# Altium PCB CurrentShuntAmp2old.PcbDoc
Units mil, origin at the board's own origin, x right, y up, seen from the top; angles counter-clockwise.
Board outline 922.5 x 280 mil, 2 copper layers (Component Side, Bottom Layer), stack 12.8 mil thick; 5 components, 5 nets, 20 pads, 0 vias.
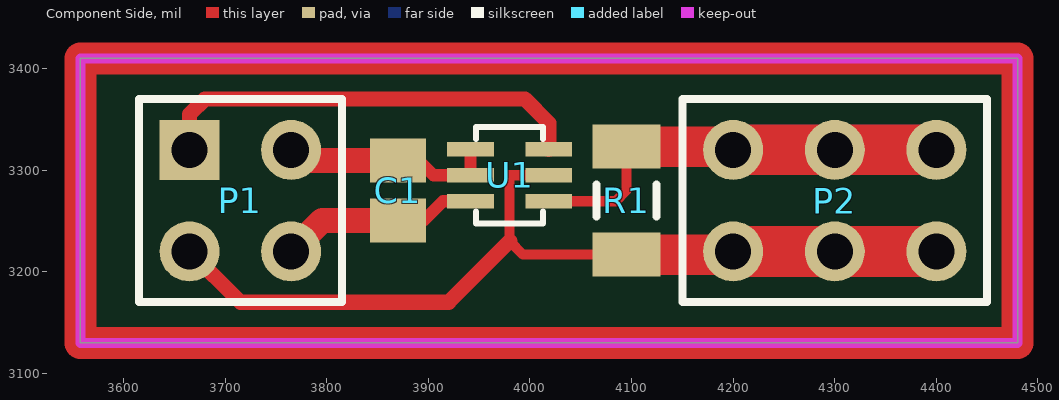
[diagram p0: Component Side view]
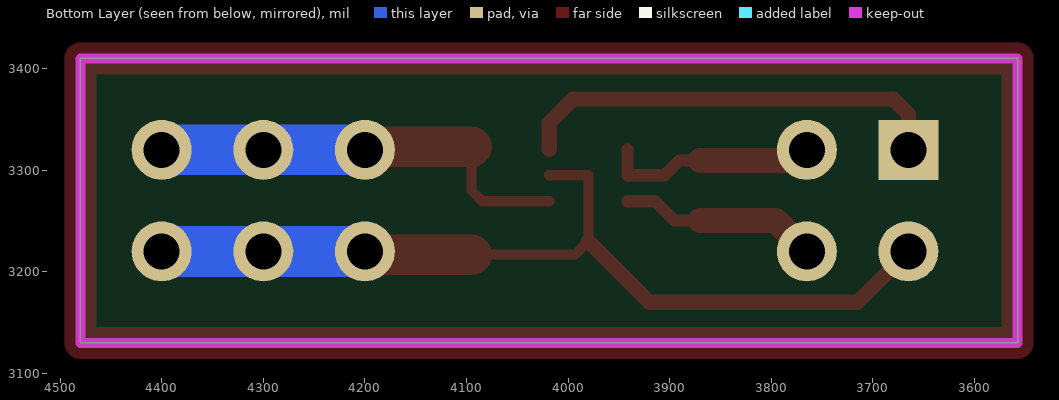
[diagram p1: Bottom Layer view, seen from below]
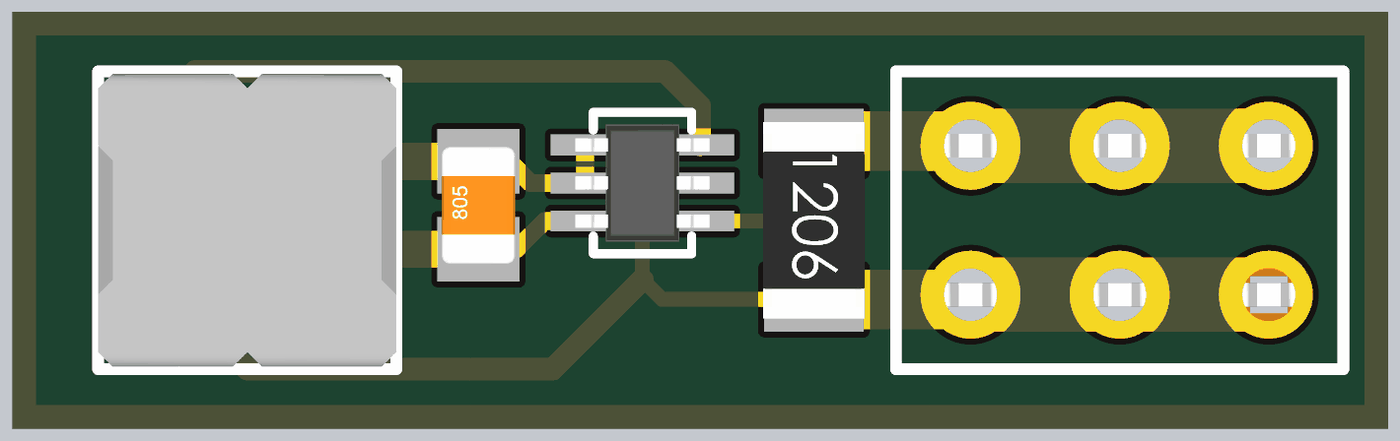
[diagram p2: 3D render of the assembled board from above, using the file's embedded part models]

## Layer stack, top to bottom
Top Solder: solder mask 0.4, Solder Resist, Dk 3.5
Component Side: signal copper 1.4
Dielectric 1: core 10, FR-4, Dk 4.2
Bottom Layer: signal copper 1.4
Solder Side: solder mask 0.4, Solder Resist, Dk 3.5

## Board outline
3557.5,3130 4480,3130 4480,3410 3557.5,3410

## Design rules (kind name [scope] priority, off if disabled: settings)
Clearance [All] p1: gap=10
PolygonConnect [All] p1: connectstyle=Direct reliefconductorwidth=10 reliefentries=4 polygonreliefangle="90 Angle" airgapwidth=10
RoutingVias [All] p1: holewidth=28 width=50 viastyle="Through Hole" minholewidth=28 minwidth=50 maxholewidth=28 maxwidth=50
SolderMaskExpansion [All] p1: expansion=4
Width [All] p1: maxlimit=50 minlimit=10 preferedwidth=10 minimp=50.000000 maximp=50.000000 favimp=50.000000
30 further rules are at their usual default settings.

## Classes and differential pairs
component class CurrentShuntAmp2: P1 P2 R1 U1

## Components (designator, comment, footprint, x,y, rotation, side; value= is the part's Value field where it differs from the comment)
C1 "Cap" C0805 3870,3280 r90 top
P1 "Header 2X2" HDR2X2 3665,3320 r270 top
P2 "Header 3X2" HDR2X3 4400,3320 r180 top
R1 "Res1" C1206 4095,3270 r270 top
U1 "INA213AIDCKR" DCK6 3980,3295 r0 top

## Footprints (in the part's own frame and the unit in brackets; to place one, negate y for a bottom-side part, rotate by r counter-clockwise, add the part's x,y. Pads: shape width x height; smd on the part's side, far side on the other; paste and mask are expansions set on the pad)
C0805 [mm] "Chip Capacitor, Body 2.0x1.3mm, IPC High Density"
  rect 1.1x1.4 smd: 1(-0.75,0) 2(0.75,0)
  body extent -1,-0.62 1,0.63, height 0.78
C1206 [mm] "Chip Capacitor, Body 3.2x1.6mm, IPC High Density"
  rect 1.1x1.7 smd: 1(-1.35,0) 2(1.35,0)
  silkscreen extent -0.4,-0.75 0.4,0.75, body extent -1.67,-0.86 1.68,0.87, height 0.85
DCK6 [mil]
  rect 46x14 smd: 1(-38.5,25.59) 2(-38.5,0) 3(-38.5,-25.59) 4(38.5,-25.59) 5(38.5,0) 6(38.5,25.59)
  silkscreen extent -33,-48 33,48, body extent -45,-39 45,39, height 37
HDR2X2 [mm] "Connector; Header; 2x2 Position"
  rect 1.5x1.5 hole 0.9: 1(0,0)
  round 1.5 hole 0.9: 2(0,2.54) 3(2.54,0) 4(2.54,2.54)
  silkscreen extent -1.27,-1.27 3.81,3.81, body extent -1.23,-1.27 3.77,3.81, height 8.6
HDR2X3 [mm] "Connector; Header; 3x2 Position"
  round 1.5 hole 0.9: 1(0,0) 2(0,2.54) 3(2.54,0) 4(2.54,2.54) 5(5.08,0) 6(5.08,2.54)
  silkscreen extent -1.27,-1.27 6.35,3.81, body extent -1.39,-1.23 6.48,3.77, height 2.79

## Part data
C1: library part "Cap Semi", "Capacitor (Semiconductor SIM Model)"
P1: "Header, 2-Pin, Dual row"
P2: "Header, 3-Pin, Dual row"
R1: "Resistor"
U1: "Imported"

## Nets (pads, with @x,y where several pads share a name; then routed paths per layer and width w, separated by ;. In a path a pad name is that pad's centre, name@x,y a point inside that pad or via, vN(x,y) a via of type N, cw(c..) or ccw(c..) an arc to the next point about the centre after c; other vN are vias at no path point)
ADC: P1.1 U1.6 | length 430.4
  Component Side w15: P1.1 3665,3355 3680,3370 3995,3370 4018.5,3346.5 U1.6
GND: C1.2 P1.2 U1.1 U1.2 | length 212.4
  Component Side w12: C1.2 3890.47,3309.53 3905,3295 U1.2 U1.1
  Component Side w25: P1.2 3775.47,3309.53 C1.2
IN+: P2.1 P2.3 P2.5 R1.1 U1.4 | length 630.3
  Component Side w10: U1.4 4084.41,3269.41 4095,3280 R1.1
  Component Side w40: R1.1 4196.85,3323.15 P2.5
  Component Side w50: P2.5 P2.3 P2.1
  Bottom Layer w50: P2.5 P2.3 P2.1
IN-: P1.3 P2.2 P2.4 P2.6 R1.2 U1.5 | length 1090.8
  Component Side w10: U1.5 3980,3295 3980,3230 3993.15,3216.85 R1.2
  Component Side w15: P1.3 3715,3170 3920,3170 3980,3230
  Component Side w40: R1.2 4196.85,3216.85 P2.6
  Component Side w50: P2.6 P2.4 P2.2
  Bottom Layer w50: P2.6 P2.4 P2.2
VCC: C1.1 P1.4 U1.3 | length 197
  Component Side w12: C1.1 3895.47,3250.47 3914.41,3269.41 U1.3
  Component Side w25: P1.4 3795.47,3250.47 C1.1
copper on no net: | length 2405
  Component Side w31.5: 3557.5,3130 3557.5,3410 4480,3410 4480,3130 3557.5,3130

## Keep-outs
Keep-Out Layer:
  the board outline again, w10

## Silkscreen, mask and mechanical layers (free items; w line width, h text height)
Top Solder:
  text "Gnd" at 3490,3300 h20 r90
  text "ADC" at 3525,3300 h18 r90
  text "Vs" at 3490,3210 h20 r90
  text "Vcc" at 3525,3205 h18 r90